# Altium PCB Hammerhead PCB R1.0.PcbDoc (part 2 of 2)
Units mil, origin at the board's own origin, x right, y up, seen from the top; angles counter-clockwise.
Board outline 4625 x 2150 mil, 4 copper layers (Top Layer, Ground Plane, Power Plane, Bottom Layer); 195 components, 202 nets, 791 pads, 418 vias.
Unrouted connection lines stored in the file: 1.
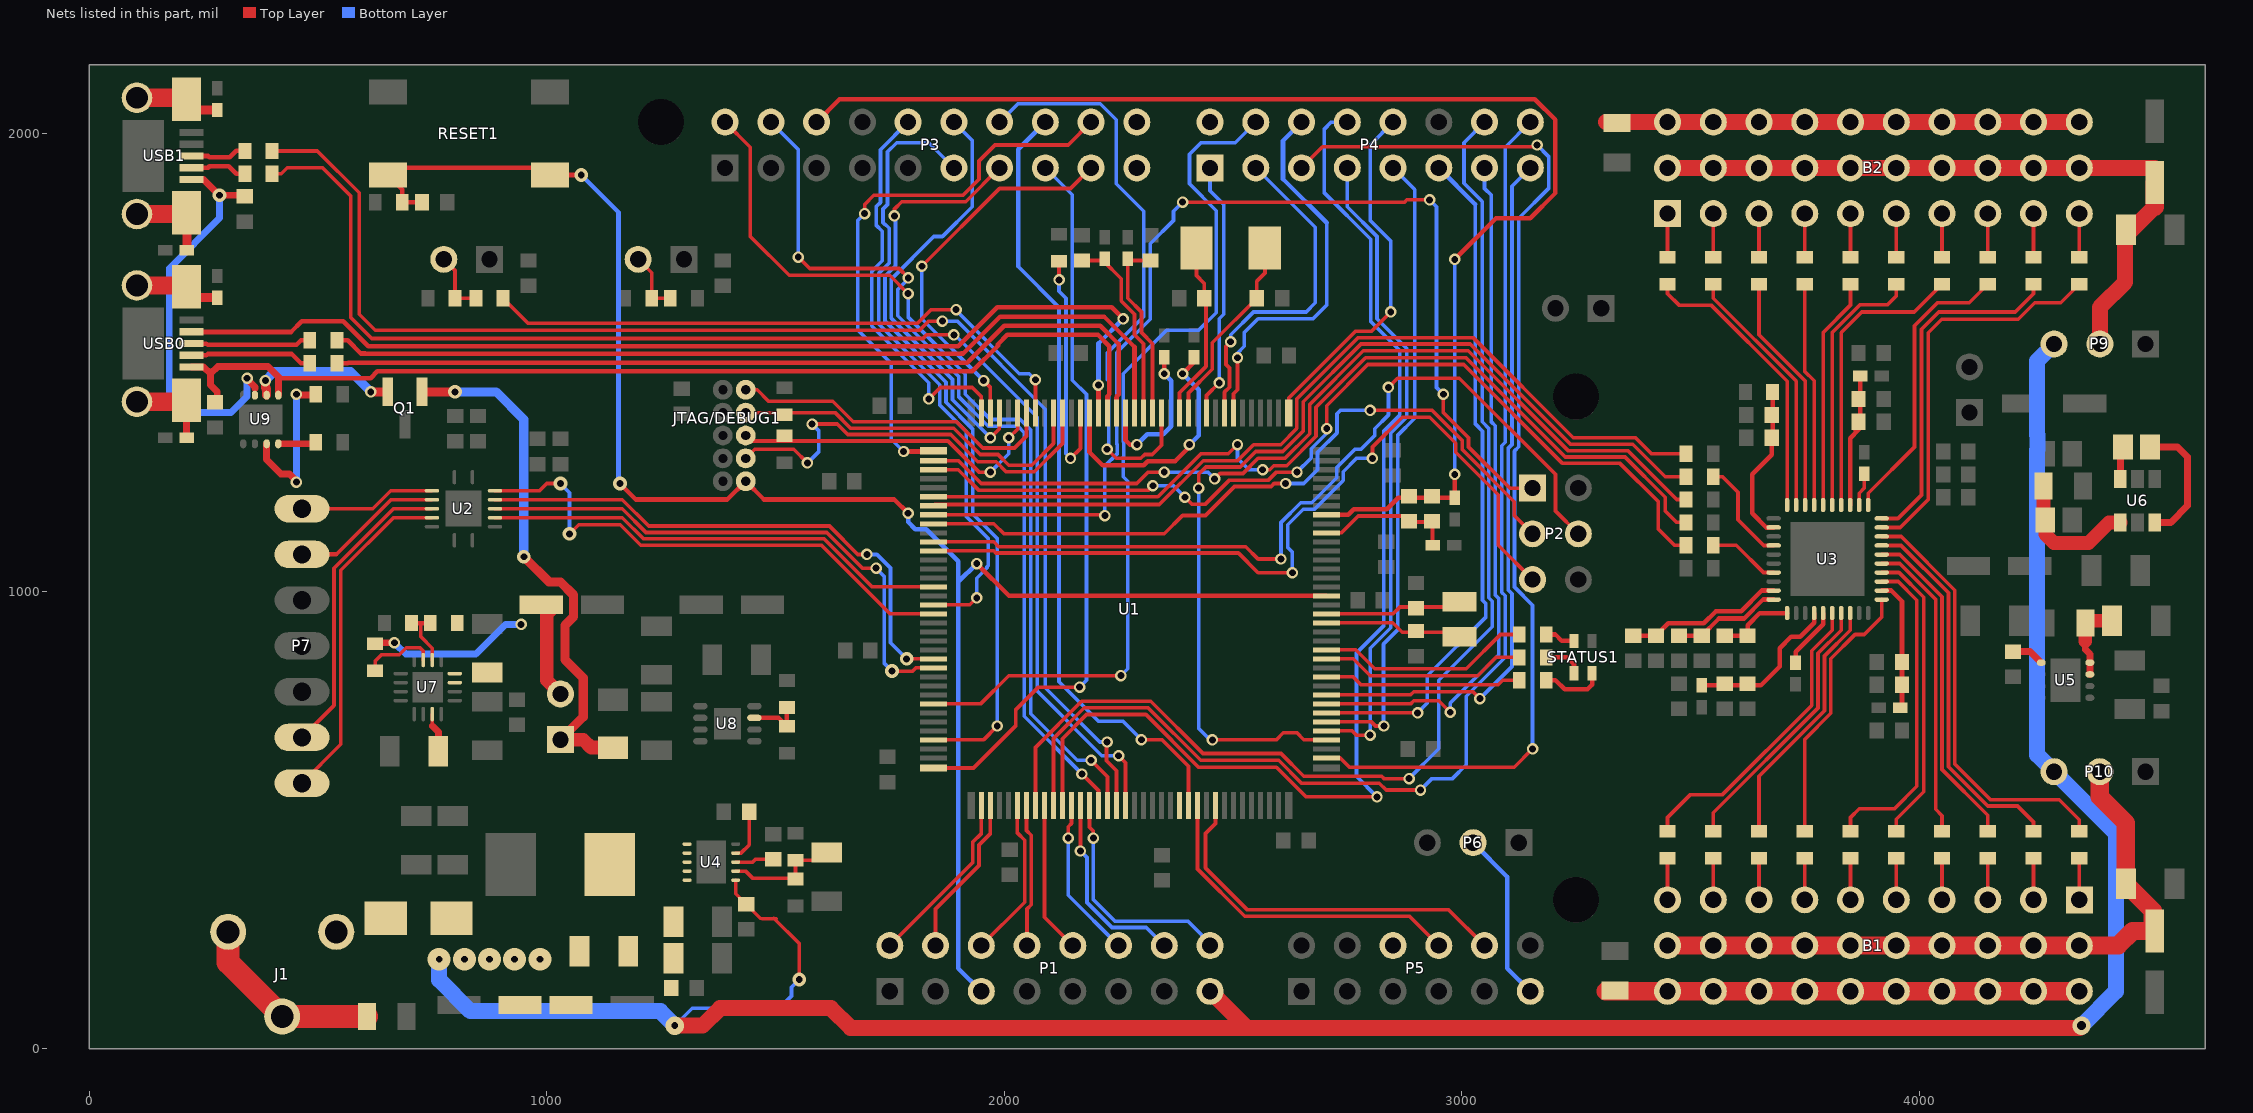
[diagram p4: the nets of this part, all layers, seen from the top]

## Via types
v1: diameter 30, hole 15, Top Layer to Bottom Layer, 230 vias
v2: diameter 25, hole 15, Top Layer to Bottom Layer, 165 vias
v3: diameter 50, hole 15, Top Layer to Bottom Layer, 14 vias
v4: diameter 40, hole 20, Top Layer to Bottom Layer, 7 vias
v5: diameter 40, hole 15, Top Layer to Bottom Layer, 1 vias
v6: diameter 50, hole 20, Top Layer to Bottom Layer, 1 vias

## Nets (pads, with @x,y where several pads share a name; then routed paths per layer and width w, separated by ;. In a path a pad name is that pad's centre, name@x,y a point inside that pad or via, vN(x,y) a via of type N, cw(c..) or ccw(c..) an arc to the next point about the centre after c; other vN are vias at no path point) (continued)
GPIO1_12: P3.17 U1.34 | length 842
  Top Layer w8: v2(1820,1710) 1990,1880 2145,1880 P3.17@2190,1925 ; v2(1955,1460) 1969.88,1445.12 U1.34@1969.88,1389.13
  Bottom Layer w8: v2(1820,1710) 1820,1595 v2(1955,1460)
GPIO1_13: P3.19
GPIO2_0: P4.10 U1.1 | length 788.2
  Top Layer w8: U1.1@2621.85,1389.13 2621.85,1421.85 2768,1568 2803,1568 v2(2845,1610)
  Bottom Layer w8: v2(2845,1610) 2845,1765 2800,1810 2800,1975 P4.10@2850,2025
GPIO2_2: P4.3 U1.8 | length 745.4
  Top Layer w8: U1.8@2481.69,1389.13 2481.69,1434.87 2492.5,1445.68 2492.5,1487.5 2485,1495 2485,1535 v2(2495,1545)
  Bottom Layer w8: v2(2495,1545) 2495,1560 2545,1610 2660,1610 2680,1630 2680,1795 P4.3@2550,1925
GPIO2_5: P4.1 U1.10 | length 563.9
  Top Layer w8: U1.10@2442.32,1389.13 2442.32,1427.32 v2(2470,1455)
  Bottom Layer w8: P4.1@2450,1925 2450,1875 2480,1845 2480,1605 2470,1595 v2(2470,1455)
GPIO2_6: P3.16 U1.97 | length 1730.6
  Top Layer w8: v2(2300,675) 2345,675 2402.95,617.05 U1.97@2402.95,530.87
  Bottom Layer w8: 2030.53,1709.47 2120,1620 2120,801.77 2206.77,715 2260,715 v2(2300,675)
  Bottom Layer w10: 2030.53,1709.47 2030.53,1965.53 P3.16@2090,2025
GPIO2_7: P4.4 U1.65 | length 1909.8
  Top Layer w8: U1.65@1845.87,753.31 1948.31,753.31 2010,815 v2(2255,815)
  Bottom Layer w8: v2(2255,815) 2270,830 2270,1240 2260,1250 2260,1293.38 2261.5,1294.88 2261.5,1325.12 2260,1326.62 2260,1475 2355,1570 2425,1570 2463.5,1608.5 2463.5,1831.5 2405,1890 2405,1955 2430,1980 2505,1980 P4.4@2550,2025
GPIO2_8: P3.20
GPIO2_9: P3.18 U1.37 | length 1240.2
  Top Layer w8: v2(1695,1825) 1695,1845 1715,1865 1910,1865 1945,1900 1945,1940 1980,1975 2140,1975 P3.18@2190,2025
  Top Layer w10: v2(1780,1305) 1844.02,1305 U1.37@1845.87,1306.85
  Bottom Layer w8: v2(1695,1825) 1680,1810 1680,1570.41 1753,1497.41 1753,1332 v2@1775,1310
GPIO2_12: P3.11 U1.54 | length 1381
  Top Layer w8: U1.54@1845.87,969.84 1924.84,969.84 v2(1940,985)
  Bottom Layer w8: P3.11@1890,1925 1835,1980 1765,1980 1745,1960 1745,1845 1735,1835 1735,1805 1738.5,1801.5 1739.71,1801.5 1748.5,1792.71 1748.5,1716.88 1725.5,1693.88 1725.5,1584.3 1859,1450.8 1859,1406.6 1917,1348.6 1917,1163 1965,1115 1965,1055 1962.5,1052.5 1962.5,1050.68 1940,1028.18 v2(1940,985)
GPIO2_14: P4.6 U1.7 | length 846.9
  Top Layer w8: U1.7@2501.38,1389.13 2501.38,1431.38 2510,1440 v2(2510,1510)
  Bottom Layer w8: v2(2510,1510) 2510,1520 2525,1535 2525,1565 2555,1595 2675,1595 2705,1625 2705,1805
  Bottom Layer w10: P4.6@2650,2025 2609.47,1984.47 2609.47,1900.53 2705,1805
GPIO3_0: P1.2 U1.74 | length 388.8
  Top Layer w8: P1.2@1750,225 1931,406 1931,450.71 1950.2,469.91 U1.74@1950.2,530.87
GPIO3_1: P1.6 U1.78 | length 351.9
  Top Layer w8: P1.6@1950,225 2045,320 2045,455 2028.94,471.06 U1.78@2028.94,530.87
GPIO3_2: P1.8 U1.79 | length 313.9
  Top Layer w8: U1.79@2048.62,530.87 2048.62,476.38 2059,466 2059,314.2 2050,305.2 P1.8@2050,225
GPIO3_3: P4.14 U1.80 | length 2610.4
  Top Layer w8: U1.80@2068.31,530.87 2068.31,658.11 2169.2,759 2320.4,759 2434.4,645 2605,645 2655,595 2825.2,595 2830.2,590 v2(2885,590)
  Bottom Layer w8: v2(2885,590) 2950,655 2950,805 3067,922 3067,977.9 3059.47,985.43 3059.47,1355.33 3045,1369.8 3045,1851.21 3005,1891.21 3005,1980 P4.14@3050,2025
GPIO3_4: P4.16 U1.82 | length 2648.6
  Top Layer w8: U1.82@2107.68,530.87 2107.68,677.68 2175,745 2314.6,745 2429.6,630 2600,630 2650,580 2820,580 2835,565 v2@2915,565
  Bottom Layer w8: v2(2910,565) 2935,590 2980,590 3010,620 3010,770.2 3095,855.2 3095,989.5 3087.47,997.03 3087.47,1317.47 3095,1325 3095,1970 P4.16@3150,2025
GPIO3_5: P4.8 U1.83 | length 2573
  Top Layer w8: U1.83@2127.36,530.87 2127.36,677.36 2180,730 2309.8,730 2424.8,615 2595,615 2660,550 v2(2815,550)
  Bottom Layer w8: P4.8@2750,2025 2715,2025 2700,2010 2700,1870 2801,1769 2801,1589.2 2865,1525.2 2865,1385 2830,1350 2830,924.6 2770,864.6 2770,595 v2(2815,550)
GPIO3_6: P5.10 U1.100 | length 825.5
  Top Layer w8: U1.100@2462.01,530.87 2462.01,492.01 2440,470 2440,394.8 2531.8,303 2972,303 P5.10@3050,225
GPIO3_8: P4.5 U1.110 | length 2389.1
  Top Layer w8: P4.5@2650,1925 2696,1971 3161,1971 v2(3165,1975) ; U1.110@2704.13,635.2 2734.79,635.2 2754.99,615 3115,615 v2(3155,655)
  Bottom Layer w8: v2(3155,655) 3155,969.1 3115.47,1008.63 3115.47,1305.87 3125,1315.4 3125,1815 3190,1880 3190,1950 v2(3165,1975)
GPIO3_9: P4.7 U1.113 | length 1426.7
  Top Layer w8: U1.113@2704.13,694.25 2760.75,694.25 2770,685 v2(2800,685)
  Bottom Layer w8: P4.7@2750,1925 2750,1840.2 2815,1775.2 2815,1595 2880,1530 2880,1380 2845,1345 2845,919.8 2800,874.8 v2(2800,685)
GPIO3_10: P4.11 U1.115 | length 1495.4
  Top Layer w8: U1.115@2704.13,733.62 v2(2903.62,733.62)
  Bottom Layer w8: v2(2903.62,733.62) 2925,755 2925,815 3053,943 3053,972.11 3045.47,979.63 3045.47,1349.53 3030,1365 3030,1845
  Bottom Layer w10: P4.11@2950,1925 3030,1845
GPIO3_11: P4.15 U1.117 | length 1557.6
  Top Layer w8: U1.117@2704.13,772.99 2887.99,772.99 2895,780 3025,780 v2(3040,765)
  Bottom Layer w8: v2(3040,765) 3110,835 3110,994.3 3101.47,1002.83 3101.47,1311.67 3110,1320.2 3110,1885 P4.15@3150,1925
GPIO3_14: P4.2
GPIO4_11: P3.15 U1.72 | length 1591.4
  Top Layer w8: U1.72@1845.87,613.15 1933.15,613.15 2025,705 2025,740 2075,790 v2(2165,790)
  Bottom Layer w8: P3.15@2090,1925 2149,1866 2149,1461 2180,1430 2180,805 v2(2165,790)
GPIO5_6: P5.6
GPIO5_7: P5.8 U1.98 | length 735.2
  Top Layer w8: U1.98@2422.64,530.87 2422.64,392.36 2526,289 2886,289 P5.8@2950,225
GPIO5_8: P4.9 U1.114 | length 1398
  Top Layer w8: U1.114@2704.13,713.94 2802.88,713.94 2811.82,705 v2(2830,705)
  Bottom Layer w8: v2(2830,705) 2829,706 2829,884 2860,915 2860,1340 2897.5,1377.5 2897.5,1877.5 P4.9@2850,1925
GPIO5_9: P4.13 U1.116 | length 1530.7
  Top Layer w8: U1.116@2704.13,753.31 2888.31,753.31 2895,760 2950,760 v2(2975,735)
  Bottom Layer w8: v2(2975,735) 2975,755 3081,861 3081,983.7 3073.47,991.23 3073.47,1361.13 3065,1369.6 3065,1865 3050,1880 P4.13@3050,1925
GPIO5_12: P3.14 U1.15 | length 1276.4
  Top Layer w8: v2(2225,1310) 2245,1290 2298.79,1290 2307.29,1298.5 2323.5,1298.5 2343.9,1318.9 U1.15@2343.9,1389.13
  Bottom Layer w8: P3.14@1990,2025 2030,2065 2210,2065 2245,2030 2245,1890 2305,1830 2305,1600 2225,1520 2225,1462.92 2228.6,1459.32 2228.6,1313.6 v2(2225,1310)
GPIO5_13: P3.12 U1.33 | length 942.6
  Top Layer w8: v2(1970,1335) 1989.57,1354.57 U1.33@1989.57,1389.13
  Bottom Layer w8: P3.12@1890,2025 1930,1985 1930,1840 1865,1775 1846.22,1775 1753.5,1682.28 1753.5,1595.9 1887,1462.4 1887,1418.2 1945,1360.2 1945,1360 v2(1970,1335)
GPIO5_14: P3.10 U1.35 | length 870.3
  Top Layer w8: v2(1835,1420) 1860,1445 1930,1445 1950.2,1424.8 U1.35@1950.2,1389.13
  Bottom Layer w8: P3.10@1790,2025 1729.53,1964.53 1729.53,1849.53 1720,1840 1720,1800 1733.5,1786.5 1733.5,1721.68 1710.5,1698.68 1710.5,1579.51 1835,1455.01 v2(1835,1420)
GPIO5_15: P1.14 U1.85 | length 425.7
  Top Layer w8: v2(2166.73,431.73) U1.85@2166.73,530.87
  Bottom Layer w8: v2(2166.73,431.73) 2181,417.46 2181,319 2235.47,264.53 2310.47,264.53 P1.14@2350,225
GPIO5_16: P1.16 U1.86 | length 508.8
  Top Layer w8: U1.86@2186.42,530.87 2186.42,483.58 2195,475 v2(2195,460)
  Bottom Layer w8: v2(2195,460) 2195,325 2241.47,278.53 2401.47,278.53 2450,230 P1.16@2450,225
GPIO5_18: P3.13 U1.69 | length 1661.3
  Top Layer w8: v2(1760,1820) 1760,1835 1776,1851 1916,1851 P3.13@1990,1925 ; U1.69@1845.87,674.57 1954.57,674.57 v2(1985,705)
  Bottom Layer w8: v2(1760,1820) 1762.5,1817.5 1762.5,1711.08 1739.5,1688.08 1739.5,1590.1 1873,1456.6 1873,1412.4 1931,1354.4 1931,1169 1985,1115 v2(1985,705)
I2C1_SCL: P3.2 U1.88 | length 2024.9
  Top Layer w8: P3.2@1390,2025 1445,1970 1445,1775 1530,1690 1750,1690 v2(1790,1650) ; v2(2190,630) 2225.79,594.21 U1.88@2225.79,530.87
  Bottom Layer w8: v2(1790,1650) 1790,1599 1915,1474 1915,1430 1970,1375 2035,1375 2058,1352 2058,732 2160,630 v2(2190,630)
I2C1_SDA: P3.4 U1.87 | length 1962.2
  Top Layer w8: v2(1550,1730) 1575,1705 1770,1705 v2(1790.43,1684.57) ; v2(2170,600) 2206.1,563.9 U1.87@2206.1,530.87
  Bottom Layer w8: P3.4@1490,2025 1550,1965 v2(1550,1730) ; v2(1790.43,1684.57) 1790.43,1682.25 1767.5,1659.32 1767.5,1601.7 1901,1468.2 1901,1424 1965,1360 2030.2,1360 2044,1346.2 2044,726 v2(2170,600)
INT: R25.1 U1.39 | length 2056
  Top Layer w8: U1.39@1845.87,1265.12 1899.88,1265.12 1945,1220 2315,1220 v2(2325,1230) ; v2(2395,1205) 2410,1190 2440,1190 2492.5,1242.5 2577.7,1242.5 2595.2,1260 v2(2640,1260) ; v2(2705,1355) 2705,1405 2795,1495 3004.6,1495 3220.6,1279 3346,1279 3430,1195 3430,1135 3465,1100 R25.1@3490.47,1100
  Bottom Layer w8: v2(2325,1230) 2370,1230 v2(2395,1205) ; v2(2640,1260) 2671,1291 2671,1310.8 2705,1344.8 v2(2705,1355)
INT_M: R25.2 U3.7 | length 157
  Top Layer w8: R25.2@3549.53,1100 3600,1100 3659.53,1040.47 U3.7@3681.89,1040.47
ISP_PGM: U1.96
MAX_CS: R24.1 U1.38 | length 1969.8
  Top Layer w8: U1.38@1845.87,1284.8 1900.2,1284.8 1950,1235 2290,1235 2315,1260 v2(2350,1260) ; v2(2460,1245) 2472,1257 2522,1257 2555,1290 2613.86,1290 2667.72,1343.87 2667.72,1407.72 2785,1525 3014.2,1525 3232.2,1307 3363,1307 3470,1200 R24.1@3490.47,1200
  Bottom Layer w8: v2(2350,1260) 2445,1260 v2(2460,1245)
MISO: R27.1 U1.42 | length 2037.7
  Top Layer w8: U1.42@1845.87,1206.06 1845.93,1206 2336,1206 2430,1300 2490,1300 v2(2510,1320) ; v2(2565,1265) 2580.4,1265 2589.4,1274 2617.66,1274 2681.72,1338.07 2681.72,1401.72 2790,1510 3009.4,1510 3226.4,1293 3357,1293 3445,1205 3445,1175 3470,1150 R27.1@3490.47,1150
  Bottom Layer w8: v2(2510,1320) 2510,1290 2535,1265 v2(2565,1265)
MOSI: R30.1 U1.43 | length 1939.7
  Top Layer w8: U1.43@1845.87,1186.38 1848.49,1189 2339,1189 2435,1285 2510.2,1285 2545.2,1320 2604.26,1320 2639.72,1355.46 2639.72,1419.72 2774,1554 3024.79,1554 3243.79,1335 3380,1335 3415,1300 R30.1@3490.47,1300
NetB1_1: B1.1 R28.2 | length 90.5
  Top Layer w8: B1.1@4350,325 R28.2@4350,415.47
NetB1_2: B1.2 R32.2 | length 90.5
  Top Layer w8: B1.2@4250,325 R32.2@4250,415.47
NetB1_3: B1.3 R36.2 | length 90.5
  Top Layer w8: B1.3@4150,325 R36.2@4150,415.47
NetB1_4: B1.4 R40.2 | length 90.5
  Top Layer w8: B1.4@4050,325 R40.2@4050,415.47
NetB1_5: B1.5 R44.2 | length 90.5
  Top Layer w8: B1.5@3950,325 R44.2@3950,415.47
NetB1_6: B1.6 R48.2 | length 90.5
  Top Layer w8: B1.6@3850,325 R48.2@3850,415.47
NetB1_7: B1.7 R52.2 | length 90.5
  Top Layer w8: B1.7@3750,325 R52.2@3750,415.47
NetB1_8: B1.8 R56.2 | length 90.5
  Top Layer w8: B1.8@3650,325 R56.2@3650,415.47
NetB1_9: B1.9 R60.2 | length 90.5
  Top Layer w8: B1.9@3550,325 R60.2@3550,415.47
NetB1_10: B1.10 R64.2 | length 90.5
  Top Layer w8: B1.10@3450,325 R64.2@3450,415.47
NetB1_11: B1.11 B1.12 B1.13 B1.14 B1.15 B1.16 B1.17 B1.18 B1.19 B1.20 C71.1 C73.2 P10.2 | length 1476
  Top Layer w40: B1.20@3450,225 4435,225 4466.93,256.93 C71.1@4515,256.93 4510.5,261.43 4510.5,301.35 C73.2@4451.85,360 4451.85,493.15 4395,550 P10.2@4395,605
NetB1_21: B1.21 B1.22 B1.23 B1.24 B1.25 B1.26 B1.27 B1.28 B1.29 B1.30 FB12.2 | length 1035
  Top Layer w40: FB12.2@3315,125 B1.21@4350,125
NetB2_1: B2.1 R65.1 | length 95.5
  Top Layer w8: R65.1@3450,1729.53 B2.1@3450,1825
NetB2_2: B2.2 R61.1 | length 95.5
  Top Layer w8: R61.1@3550,1729.53 B2.2@3550,1825
NetB2_3: B2.3 R57.1 | length 95.5
  Top Layer w8: R57.1@3650,1729.53 B2.3@3650,1825
NetB2_4: B2.4 R53.1 | length 95.5
  Top Layer w8: R53.1@3750,1729.53 B2.4@3750,1825
NetB2_5: B2.5 R49.1 | length 95.5
  Top Layer w8: R49.1@3850,1729.53 B2.5@3850,1825
NetB2_6: B2.6 R45.1 | length 95.5
  Top Layer w8: R45.1@3950,1729.53 B2.6@3950,1825
NetB2_7: B2.7 R41.1 | length 95.5
  Top Layer w8: R41.1@4050,1729.53 B2.7@4050,1825
NetB2_8: B2.8 R37.1 | length 95.5
  Top Layer w8: R37.1@4150,1729.53 B2.8@4150,1825
NetB2_9: B2.9 R33.1 | length 95.5
  Top Layer w8: R33.1@4250,1729.53 B2.9@4250,1825
NetB2_10: B2.10 R29.1 | length 95.5
  Top Layer w8: R29.1@4350,1729.53 B2.10@4350,1825
NetB2_11: B2.11 B2.12 B2.13 B2.14 B2.15 B2.16 B2.17 B2.18 B2.19 B2.20 C72.1 C74.2 P9.2 | length 1467.8
  Top Layer w35: B2.11@3450,1925 B2.12@3550,1925 B2.13@3650,1925 B2.14@3750,1925 B2.15@3850,1925 B2.16@3950,1925 B2.17@4050,1925 B2.18@4150,1925 B2.19@4250,1925 B2.20@4350,1925 C72.1@4515,1925 ; P9.2@4395,1540 4395,1620 4450,1675 4450,1755 4450,1775 4515,1840
  Top Layer w40: 4515,1840 C72.1@4515,1893.07
NetB2_21: B2.21 B2.22 B2.23 B2.24 B2.25 B2.26 B2.27 B2.28 B2.29 B2.30 FB13.1 | length 1035
  Top Layer w35: FB13.1@3315,2025 B2.30@4350,2025
NetC5_2: C5.2 FB1.2 U1.17 | length 416
  Top Layer w8: C5.2@2170,1722.44 2216.06,1722.44 2256,1682.5 2256,1634.2 2285,1605.2 2285,1560 2304.53,1540.47 U1.17@2304.53,1389.13
NetC6_2: C6.2 FB2.2 U1.16 | length 411.3
  Top Layer w8: C6.2@2320,1722.44 2273.94,1722.44 FB2.2@2270,1726.38 2270,1640 2300,1610 2300,1565 2324.21,1540.79 U1.16@2324.21,1389.13
NetC34_2: C34.2 C35.2 U3.9 | length 347.7
  Top Layer w10: C35.2@3375,902.56 C34.2@3425,902.56 3451.75,929.31 3529.12,929.31 3555.81,956 3610.75,956 3655.85,1001.1 U3.9@3681.89,1001.1
NetC36_2: C36.2 C37.2 U3.10 | length 239.6
  Top Layer w10: C36.2@3475,902.56 C37.2@3525,902.56 3562.44,940 3617.37,940 3658.79,981.42 U3.10@3681.89,981.42
NetC38_2: C38.2 C39.2 U3.11 | length 170
  Top Layer w10: C39.2@3575,902.56 C38.2@3625,902.56 3625,925 3651.89,951.89 U3.11@3711.42,951.89
NetC40_2: C40.2 C41.2 FB7.1 U3.14 | length 347
  Top Layer w10: FB7.1@3525,793.62 3653.62,793.62 3695,835 3695,875 3720,900 3740,900 3770.47,930.47 U3.14@3770.47,951.89
NetC42_2: C42.2 C43.2 FB8.1 U3.22 | length 288.3
  Top Layer w10: U3.22@3918.11,1001.1 3938.9,1001.1 3962.56,977.44 C42.2@3962.56,845 C43.2@3962.56,795 3962.56,748.94 FB8.1@3958.62,745
NetC44_2: C44.2 C45.2 R20.2 U3.2 | length 340.4
  Top Layer w10: C44.2@3677.56,1335 3677.56,1297.56 3635,1255 3635,1170 3666.1,1138.9 U3.2@3681.89,1138.9 ; C44.2@3679.53,1336.97 R20.2@3679.53,1435
NetC46_2: C46.2 C47.2 FB9.1 U3.33 | length 301.6
  Top Layer w10: U3.33@3849.21,1188.11 3849.21,1334.21 3867.44,1352.44 C46.2@3867.44,1360 ; C46.2@3860,1352.56 C46.2@3867.44,1360 ; FB9.1@3871.38,1470 3871.38,1373.94 C46.2@3867.44,1370 C46.2@3867.44,1360
NetC51_2: C51.2 U7.11 | length 86.5
  Top Layer w8: 749.84,705.16 U7.11@749.84,730.94
  Top Layer w15: 749.84,705.16 763.15,691.85 C51.2@763.15,650
NetC52_2: C52.2 U5.5 | length 71.9
  Top Layer w15: C52.2@4205,867.56 4242.68,867.56 U5.5@4266.85,843.39
NetC55_2: C55.2 FB16.1 U6.1 | length 298.3
  Top Layer w30: FB16.1@4271.69,1230 4271.69,1158.78 C55.2@4275.47,1155 4275.47,1124.53 4295,1105 4370,1105 4415,1150 U6.1@4440,1150
NetC57_1: C57.1 U6.6 | length 72.8
  Top Layer w15: U6.6@4440,1244.49 C57.1@4440,1309.53
  Top Layer w25: C57.1@4440,1309.53 C57.1@4445.47,1315
NetC57_2: C57.2 U6.3 | length 284.7
  Top Layer w15: C57.2@4504.53,1315 4565,1315 4586.5,1293.5 4586.5,1186.5 4550,1150 U6.3@4514.8,1150
NetC87_2: C87.2 FB15.1 U5.3 U5.4 | length 176.8
  Top Layer w15: 4363.15,890 4363.15,871.85 4373.15,861.85 U5.4@4373.15,843.39 U5.3@4373.15,817.8 ; FB15.1@4363.31,930 FB15.1@4368.31,935
  Top Layer w30: 4363.15,890 FB15.1@4363.15,929.84 ; FB15.1@4368.31,935 C87.2@4421.85,935
NetC96_1: C96.1 C99.2 P8.2 R31.1 R34.2 U7.15 U7.16 | length 597.9
  Top Layer w15: R31.1@627.47,887 v2(667,887) ; C96.1@988.07,970 C96.1@1020,970
  Top Layer w30: C96.1@1020,970 1000,950 1000,805 P8.2@1030,775
  Bottom Layer w15: v2@669.5,884.5 692,862 845,862 910,927 v2(944,927)
NetD3_1: D3.1 P8.1 Q1.1 | length 1174.4
  Top Layer w20: Q1.1@727.4,1435.43 v1(799.57,1435.43) ; v1(950,1075) 1005,1020 1030,1020 1058.68,991.32 1058.68,943.68 1040,925 1040,850 1080,810 1080,725 P8.1@1030,675
  Top Layer w30: P8.1@1030,675 1080,675 1097.17,657.83 D3.1@1145,657.83
  Bottom Layer w20: v1(799.57,1435.43) 889.57,1435.43 950,1375 v1(950,1075)
NetD5_2: D5.2 J1.1
NetDBGEN1_2: DBGEN1.2 R16.2 R17.2 | length 138.2
  Top Layer w8: DBGEN1.2@1200,1725 1229.53,1695.47 R17.2@1229.53,1640 R16.2@1270.47,1640
NetFB3_1: FB3.1 U1.23 | length 569.1
  Top Layer w10: U1.23@2186.42,1389.13 2186.42,1303.58 2215,1275 2305,1275 2313.5,1283.5 2373.5,1283.5 2401.5,1311.5 2401.5,1323.5 v2(2405,1320) ; v2(2390,1475) 2415,1500 FB3.1@2415,1511.38
  Bottom Layer w10: v2(2390,1475) 2425,1440 2425,1340 v2(2405,1320)
NetFB4_1: FB4.1 U1.19 | length 337.4
  Top Layer w10: U1.19@2265.16,1389.13 2265.16,1329.84 2275,1320 v2(2290,1320) ; v2(2350,1475) FB4.1@2350,1511.38
  Bottom Layer w10: v2(2290,1320) 2312.5,1342.5 2347.5,1342.5 2365,1360 2365,1460 v2(2350,1475)
NetFB10_2: FB10.2 U3.15 | length 121.8
  Top Layer w10: FB10.2@3730,855 3730,867.37 3790.16,927.53 U3.15@3790.16,951.89
NetFB11_2: FB11.2 U3.32 | length 72.9
  Top Layer w8: U3.32@3868.9,1188.11 3868.9,1213.9 3880,1225 FB11.2@3880,1256.38
NetFB14_2: FB14.2 J1.2 J1.3 | length 418.8
  Top Layer w30: FB14.2@606.69,70 FB14.2@606.69,70
  Top Layer w50: J1.2@303.78,255 303.78,188.07 J1.3@421.89,69.96 FB14.2@606.69,70
NetFB17_2: FB17.2 USB0.8 USB0.9 | length 153.2
  Top Layer w20: USB0.9@236.26,1641.38 FB17.2@280,1641.38
  Top Layer w40: USB0.8@104.37,1667.95 209.69,1667.95 USB0.9@212.64,1665
NetFB18_2: FB18.2 USB1.8 USB1.9 | length 175.6
  Top Layer w20: USB1.9@209.69,2051.38 FB18.2@280,2051.38
  Top Layer w40: USB1.8@104.37,2077.95 USB1.9@209.69,2077.95
NetFB19_2: FB19.2 USB0.6 USB0.7 | length 190.5
  Top Layer w15: FB19.2@212.64,1335.98 USB0.6@212.64,1416.97
  Top Layer w40: USB0.7@104.37,1414.02 209.69,1414.02 USB0.6@212.64,1416.97
NetFB21_2: FB21.2 USB1.6 USB1.7 | length 186.3
  Top Layer w20: FB21.2@213.62,1745 USB1.6@213.62,1825.98
  Top Layer w40: USB1.7@104.37,1824.02 USB1.6@209.69,1824.02
NetP5_11: P5.11 P6.2 | length 376.8
  Bottom Layer w10: P6.2@3025,450 3100,375 3100,175 P5.11@3150,125
NetP7_1: P7.1 U2.13 | length 300.4
  Top Layer w8: P7.1@465,1180 620,1180 659.37,1219.37 U2.13@749.1,1219.37
NetP7_2: P7.2 U2.12 | length 333.7
  Top Layer w8: 540,1080 659.68,1199.68 U2.12@749.1,1199.68
  Top Layer w10: P7.2@465,1080 540,1080
NetP7_6: P7.6 U2.11 | length 666.9
  Top Layer w8: P7.6@465,680 535,750 535,1050 665,1180 U2.11@749.1,1180
NetP7_7: P7.7 U2.10 | length 747.2
  Top Layer w8: P7.7@465,580 550,665 550,1045.2 665.11,1160.31 U2.10@749.1,1160.31
NetQ1_2: Q1.2 U9.6 | length 327.4
  Top Layer w20: v2(385,1460) 385.7,1459.3 385.7,1444.3 387.8,1442.2 U9.6@387.8,1428.15 ; v2(615.43,1435.43) Q1.2@652.6,1435.43
  Bottom Layer w20: v2(385,1460) 405,1480 570.87,1480 v2(615.43,1435.43)
NetR9_2: R9.2 U1.24 | length 549
  Top Layer w8: v2(2120,1680) R9.2@2120,1720.47 ; v2(2145,1290) 2166.73,1311.73 U1.24@2166.73,1389.13
  Bottom Layer w8: v2(2120,1680) 2120,1655 2135,1640 2135,1300 v2(2145,1290)
NetR10_2: R10.2 STATUS1.3 | length 86.9
  Top Layer w10: R10.2@3184.53,855 3230,855 3245.63,839.37 STATUS1.3@3245.63,820
NetR11_1: R11.1 STATUS1.4 | length 67
  Top Layer w10: R11.1@3184.53,905 3205,905 3219.13,890.87 STATUS1.4@3245.63,890.87
NetR13_2: R13.2 STATUS1.2 | length 137.9
  Top Layer w10: R13.2@3184.53,805 3205,805 3225,785 3275,785 3285,795 STATUS1.2@3285,820
NetR14_2: R14.2 R15.2 TRST1.2 | length 141.1
  Top Layer w8: TRST1.2@775,1725 799.53,1700.47 R15.2@799.53,1640 R14.2@845.47,1640
NetR21_1: R21.1 R22.2 U8.3 | length 119.5
  Top Layer w10: U8.3@1454.06,722.8 1506.73,722.8 R21.1@1525,704.53 R22.2@1525,745.47
NetR28_1: R28.1 U3.28 | length 936.4
  Top Layer w8: U3.28@3918.11,1119.21 3960.59,1119.21 4078,1001.8 4078,621.8 4155.8,544 4306,544 4350,500 R28.1@4350,474.53
NetR29_2: R29.2 U3.29 | length 865.7
  Top Layer w8: U3.29@3918.11,1138.9 3958.9,1138.9 4020,1200 4020,1564.75 4049.25,1594 4216.63,1594 4252.63,1630 4309.53,1630 R29.2@4350,1670.47
NetR31_2: R31.2 U7.3 | length 161.4
  Top Layer w8: R31.2@625,825.47 625,847 638.75,860.75 677.75,860.75 693,876 723,876 730.16,868.84 U7.3@730.16,849.06
NetR32_1: R32.1 U3.27 | length 808.5
  Top Layer w8: 3935,1099.53 3960.47,1099.53 4064,996 4064,616 4150,530 4215,530 4250,495 R32.1@4250,474.53
NetR33_2: R33.2 U3.30 | length 768.2
  Top Layer w8: U3.30@3918.11,1158.58 3953.58,1158.58 4005,1210 4005,1572.37 4042.63,1610 4210,1610 4250,1650 R33.2@4250,1670.47
NetR34_1: R34.1 R35.2 U7.2 | length 132.2
  Top Layer w8: 725,930 725,900 749.84,875.16 U7.2@749.84,849.06
  Top Layer w10: R35.2@704.53,930 R34.1@745.47,930
NetR36_1: R36.1 U3.26 | length 724.4
  Top Layer w8: U3.26@3918.11,1079.84 3957.46,1079.84 4050,987.3 4050,610 4150,510 R36.1@4150,474.53
NetR37_2: R37.2 U3.31 | length 631.4
  Top Layer w8: U3.31@3888.58,1188.11 3888.58,1213.58 3990,1315 3990,1580 4040,1630 4109.53,1630 R37.2@4150,1670.47
NetR40_1: R40.1 U3.25 | length 663.2
  Top Layer w8: U3.25@3918.11,1060.16 3957.34,1060.16 4036,981.5 4036,523 4050,509 R40.1@4050,474.53
NetR41_2: R41.2 U3.34 | length 641
  Top Layer w8: U3.34@3829.53,1188.11 3829.53,1564.93 3874.6,1610 3989.53,1610 R41.2@4050,1670.47
NetR44_1: R44.1 U3.24 | length 650.9
  Top Layer w8: U3.24@3918.11,1040.47 3955.74,1040.47 4010,986.21 4010,561 3950,501 R44.1@3950,474.53
NetR45_2: R45.2 U3.35 | length 575.7
  Top Layer w8: U3.35@3809.84,1188.11 3809.84,1565.04 3870.8,1626 3931,1626 3950,1645 R45.2@3950,1670.47
NetR48_1: R48.1 U3.23 | length 704.4
  Top Layer w8: R48.1@3850,474.53 3850,505 3869,524 3946,524 3995,573 3995,980 3954.21,1020.79 U3.23@3918.11,1020.79
NetR49_2: R49.2 U3.36 | length 507.1
  Top Layer w8: U3.36@3790.16,1188.11 3790.16,1565.16 3850,1625 R49.2@3850,1670.47
NetR52_1: R52.1 U3.21 | length 588.2
  Top Layer w8: R52.1@3750,474.53 3750,675.6 3807,732.6 3807,852 3860,905 3880,905 3918.11,943.11 U3.21@3918.11,981.42
NetR53_2: R53.2 U3.37 | length 490.8
  Top Layer w8: R53.2@3750,1670.47 3750,1480 3770.47,1459.53 U3.37@3770.47,1188.11
NetR56_1: R56.1 U3.18 | length 559.9
  Top Layer w8: R56.1@3650,474.53 3650,595.4 3793,738.4 3793,858 3849.21,914.21 U3.18@3849.21,951.89
NetR57_2: R57.2 U3.38 | length 524.1
  Top Layer w8: R57.2@3650,1670.47 3650,1560 3750.79,1459.21 U3.38@3750.79,1188.11
NetR60_1: R60.1 U3.17 | length 593.1
  Top Layer w8: R60.1@3550,474.53 3550,515.2 3779,744.2 3779,863.8 3829.53,914.33 U3.17@3829.53,951.89
NetR61_2: R61.2 U3.39 | length 557.4
  Top Layer w8: R61.2@3550,1670.47 3550,1640 3731.1,1458.9 U3.39@3731.1,1188.11
NetR64_1: R64.1 U3.16 | length 667.4
  Top Layer w8: R64.1@3450,474.53 3450,505 3500,555 3570,555 3765,750 3765,869.6 3809.84,914.44 U3.16@3809.84,951.89
NetR65_2: R65.2 U3.40 | length 631.8
  Top Layer w8: R65.2@3450,1670.47 3450,1650 3475,1625 3545.2,1625 3711.42,1458.78 U3.40@3711.42,1188.11
NetR75_2: R75.2 U9.4 | length 83.5
  Top Layer w15: U9.4@413.39,1321.85 R75.2@496.85,1321.85
RESET: C13.2 JTAG/DEBUG1.10 P1.5 R12.1 RESET1.1 U1.128 | length 3925.9
  Top Layer w10: C13.2@727.44,1850 R12.1@684.53,1850 684.53,1877.76 RESET1.1@652.83,1909.45 668.39,1925 991.61,1925 RESET1.1@1007.17,1909.45 v1(1075.55,1909.45) ; v1(1160,1235) 1195,1200 1395,1200 JTAG/DEBUG1.10@1435,1240 1475,1200 1760,1200 v2(1790,1170) ; v2(1940,1060) 2010.47,989.53 U1.128@2704.13,989.53
  Bottom Layer w10: v1(1075.55,1909.45) 1156.97,1828.03 v1@1156.97,1238.03 ; v2(1790,1170) 1790,1150.81 1805.81,1135 1830,1135 1900,1065 1900,1020 ; v2(1940,1060) 1900,1020 ; P1.5@1950,125 1900,175 1900,1020
  Bottom Layer w15: v1@1156.97,1238.03 v1(1160,1235)
RTCX1: C19.2 U1.125 X2.1 | length 303.5
  Top Layer w8: U1.125@2704.13,930.47 2849.53,930.47 2870,910 2985,910 X2.1@2995,900
RTCX2: C20.2 U1.126 X2.2 | length 301.9
  Top Layer w8: U1.126@2704.13,950.16 2850.16,950.16 2865,965 2983.23,965 X2.2@2995,976.77
SCK: R23.2 U3.4 | length 230.1
  Top Layer w8: R23.2@3549.53,1250 3570,1250 3604,1216 3604,1155.6 3660.07,1099.53 U3.4@3681.89,1099.53
SCLK: R23.1 U1.112 | length 2201.2
  Top Layer w8: v2(2425,1225) 2425,1255 2441,1271 2516,1271 2550,1305 2609.06,1305 2653.72,1349.67 2653.72,1413.72 2780,1540 3018.99,1540 3237.99,1321 3374,1321 3445,1250 R23.1@3490.47,1250 ; v2(2455,674.57) 2594.57,674.57 2610,690 2640,690 2655,675 U1.112@2705,675
  Bottom Layer w8: v2(2425,1225) 2425,700 v2@2455,670
SGPIO6: P1.12 U1.84 | length 354.3
  Top Layer w8: v2(2140,460) 2140,485 2147.05,492.05 U1.84@2147.05,530.87
  Bottom Layer w8: v2(2140,460) 2140,335 P1.12@2250,225
SS: C86.2 U4.4 | length 109.3
  Top Layer w8: U4.4@1413.15,427.19 1424.69,427.19 1442.56,445.06 C86.2@1442.56,517.5
SSP1_MISO: P2.1 U1.44 | length 2425.4
  Top Layer w8: U1.44@1845.87,1166.69 v2@2220,1166.69 ; v2(2390,1850) 2875,1850 2880,1855 v2(2930,1855) ; v2(2960,1430) 2960,1390 3015,1335 3015,1315 3105,1225 P2.1@3155,1225
  Bottom Layer w8: v2(2220,1165) 2220,1273.18 2247.5,1300.68 2247.5,1319.32 2246,1320.82 2246,1521.2 2319,1594.2 2319,1759 2370,1810 2370,1830 v2(2390,1850) ; v2(2930,1855) 2945,1840 2945,1445 v2(2960,1430)
SSP1_MOSI: P2.4 U1.47 | length 1880.1
  Top Layer w8: U1.47@1845.87,1107.64 1977.17,1107.64 1987.81,1097 2528,1097 2555,1070 v2(2605,1070) ; v2(2840,1445) 2860,1465 2995,1465 3205,1255 3205,1175 P2.4@3255,1125
  Bottom Layer w8: v2(2605,1070) 2605,1150 2648,1193 2672.4,1193 2727,1247.6 2727,1270.18 2766.82,1310 2780,1310 2810,1340 2810,1355 2840,1385 v2(2840,1445)
SSP1_SCK: P2.3 U1.45 | length 1618.1
  Top Layer w8: U1.45@1845.87,1147.01 1977.4,1147.01 1999.41,1125 2350,1125 2390,1165 2440,1165 2503.5,1228.5 2583.5,1228.5 2590,1235 v2(2615,1235) ; v2(2800,1395) 2935,1395 3001,1329 3001,1309.2 3115,1195.2 3115,1165 P2.3@3155,1125
  Bottom Layer w8: v2(2615,1235) 2655,1235 2685,1265 2685,1303.18 2727.5,1345.68 2727.5,1387.5 2735,1395 v2(2800,1395)
SSP1_SSEL: P2.5 U1.48 | length 1794.7
  Top Layer w8: U1.48@1845.87,1087.95 1977.06,1087.95 1982.01,1083 2512,1083 2555,1040 v2(2630,1040) ; v2(2805,1290) 2805,1315 2870,1380 2930.2,1380 2987,1323.2 2987,1303.4 3080,1210.4 3080,1100 P2.5@3155,1025
  Bottom Layer w8: v2(2630,1040) 2630,1085 2620,1095 2620,1145 2654,1179 2678.2,1179 2741,1241.8 2741,1261 2770,1290 v2(2805,1290)
STATUS_BLUE: R11.2 U1.122 | length 469.6
  Top Layer w8: U1.122@2704.13,871.42 2768.58,871.42 2810,830 3010,830 3085,905 R11.2@3125.47,905
STATUS_GREEN: R10.1 U1.121 | length 453.1
  Top Layer w8: U1.121@2704.13,851.73 2763.27,851.73 2800,815 3035,815 3075,855 R10.1@3125.47,855
STATUS_RED: R13.1 U1.119 | length 432.7
  Top Layer w8: U1.119@2704.13,812.36 2762.64,812.36 2780,795 3080,795 3090,805 R13.1@3125.47,805
SW: C80.2 L1.1 U4.6 U4.7
TCK/SWDCLK: JTAG/DEBUG1.4 R19.1 U1.27 | length 806.5
  Top Layer w8: JTAG/DEBUG1.4@1435,1390 1630.2,1390 1664.2,1356 1889.94,1356 1947.44,1298.5 1986.5,1298.5 2010,1275 2060,1275 2107.68,1322.68 U1.27@2107.68,1389.13
TDI: JTAG/DEBUG1.8 U1.26 | length 939.8
  Top Layer w8: JTAG/DEBUG1.8@1435,1290 1455,1310 1540,1310 v2(1570,1280) ; v2(1580,1365) 1635,1365 1658,1342 1883,1342 1942.5,1282.5 1982.5,1282.5 2004,1261 2065.8,1261 2127.36,1322.56 U1.26@2127.36,1389.13
  Bottom Layer w8: v2(1570,1280) 1595,1305 1595,1350 v2(1580,1365)
TDO/SWO: JTAG/DEBUG1.6 R18.1 U1.31 | length 722.6
  Top Layer w8: JTAG/DEBUG1.6@1435,1340 1447,1328 1877,1328 1945,1260 v2(1970,1260) ; v2(2010,1335) 2030,1355 2030,1388.07 U1.31@2028.94,1389.13
  Bottom Layer w8: v2(1970,1260) 2010,1300 v2(2010,1335)
TMS/SWDIO: JTAG/DEBUG1.2 U1.30 | length 727.8
  Top Layer w8: JTAG/DEBUG1.2@1435,1440 1460,1440 1485,1415 1625,1415 1670,1370 1895.74,1370 1953.24,1312.5 2022.5,1312.5 2048.62,1338.62 U1.30@2048.62,1389.13
TRST: R14.1 U1.29 | length 1336.1
  Top Layer w8: R14.1@904.53,1640 959.53,1585 1810,1585 1840,1615 v2(1895,1615) ; U1.29@2068.31,1389.13 v2(2068.31,1461.69)
  Bottom Layer w8: v2(1895,1615) 1895,1613.18 2033.18,1475 2055,1475 v2(2068.31,1461.69)
U0_RXD: P1.10 U1.81 | length 331.6
  Top Layer w8: U1.81@2087.99,530.87 2087.99,287.01 P1.10@2150,225
U0_TXD: P1.4 U1.75 | length 355.5
  Top Layer w8: P1.4@1850,225 1850,305 1945,400 1945,444.91 1969.88,469.8 U1.75@1969.88,530.87
UART1_CTS: U1.55 U2.2 | length 1152.7
  Top Layer w8: U2.2@886.9,1219.37 984.37,1219.37 1000,1235 v1(1030,1235) ; v1(1050,1125) 1070,1145 1160.6,1145 1205.6,1100 1600.6,1100 1750.45,950.16 U1.55@1845.87,950.16
  Bottom Layer w8: v1(1030,1235) 1050,1215 v1(1050,1125)
UART1_RTS: U1.52 U2.5 | length 1021.6
  Top Layer w8: U2.5@886.9,1160.31 1165.09,1160.31 1211.4,1114 1606.4,1114 1711.19,1009.21 U1.52@1845.87,1009.21
UART1_RX: U1.61 U2.4 | length 1220.2
  Top Layer w8: U2.4@886.9,1180 1165.2,1180 1217.2,1128 1612.2,1128 1690.2,1050 v2(1720,1050) ; v1(1755,825) 1800,825 1807.05,832.05 U1.61@1845.87,832.05
  Bottom Layer w8: v2(1720,1050) 1737.56,1032.44 1737.56,842.44 v1(1755,825)
UART1_TX: U1.60 U2.3 | length 1198.8
  Top Layer w8: U2.3@886.9,1199.68 1165.32,1199.68 1223,1142 1618,1142 1680,1080 v2(1700,1080) ; v1(1786.73,851.73) U1.60@1845.87,851.73
  Bottom Layer w8: v2(1700,1080) 1721.82,1080 1751.56,1050.26 1751.56,886.91 v1(1786.73,851.73)
USB0_ID: U1.22 USB0.4 | length 2343.1
  Top Layer w10: USB0.4@223.46,1566.57 223.87,1566.17 441.17,1566.17 465,1590 555,1590 610,1535 1900,1535 1985,1620 2235,1620 v2(2260,1595) ; U1.22@2206.1,1389.13 v2(2206.1,1450)
  Bottom Layer w10: v2(2206.1,1450) 2206.1,1541.1 v2(2260,1595)
USB0_N: R71.2 U1.20 | length 1911.7
  Top Layer w10: R71.2@541.53,1498 565,1498 566.14,1499.14 1919.14,1499.14 2000,1580 2210,1580 2250,1540 2250,1429.53 2246,1425.53 2246,1423.37 2245.47,1422.85 U1.20@2245.47,1389.13
USB0_P: R70.2 U1.18 | length 1960.8
  Top Layer w10: R70.2@541.53,1548 565,1548 593.86,1519.14 603.23,1519.14 603.37,1519 1906.63,1519 1906.77,1519.14 1910.86,1519.14 1991.72,1600 2218.28,1600 2284.84,1533.44 U1.18@2284.84,1389.13
USB0P_N: R71.1 USB0.2 | length 268.5
  Top Layer w10: USB0.2@223.46,1515.39 256,1515.39 258.8,1518.19 442.81,1518.19 463,1498 R71.1@482.47,1498
USB0P_P: R70.1 USB0.3 | length 264.2
  Top Layer w10: USB0.3@223.46,1540.98 256,1540.98 258.8,1538.19 453.19,1538.19 463,1548 R70.1@482.47,1548
USB1_N: R73.2 U1.90 | length 3016.4
  Top Layer w8: R73.2@399.53,1912 420,1912 433,1925 510,1925 572,1863 572,1597.54 617.54,1552 1822.46,1552 1830.46,1560 v2(1890,1560) ; v2(2250,640) 2265.16,624.84 U1.90@2265.16,530.87
  Bottom Layer w8: v2(1890,1560) 1892,1560 2072,1380 2072,781.33 2213.33,640 v2(2250,640)
USB1_P: R72.2 U1.89 | length 3038.1
  Top Layer w8: R72.2@399.53,1962 498.46,1962 590,1870.46 590,1605 625,1570 1815,1570 1835,1590 v2(1865,1590) ; v2(2225,670) 2223.5,668.5 2223.5,629.02 2245.47,607.05 U1.89@2245.47,530.87
  Bottom Layer w8: v2(1865,1590) 1897.48,1590 2090,1397.48 2090,788.79 2208.79,670 v2(2225,670)
USB1P_N: R73.1 USB1.2 | length 124.9
  Top Layer w10: USB1.2@223.46,1925.39 260,1925.39 262.8,1928.19 304.81,1928.19 321,1912 R73.1@340.47,1912
USB1P_P: R72.1 USB1.3 | length 123.9
  Top Layer w10: USB1.3@223.46,1950.98 260,1950.98 262.8,1948.19 307.19,1948.19 321,1962 R72.1@340.47,1962
VBST: C80.1 U4.8
VBUS0: C105.2 R74.2 U1.21 U9.3 U9.5 USB0.1 | length 2687.1
  Top Layer w10: 420,1465 615,1465 630,1480 1930,1480 1986.5,1536.5 1986.5,1539.73 2006.77,1560 2205,1560 2230,1535 2230,1430 2225.79,1425.79 U1.21@2225.79,1389.13
  Top Layer w15: USB0.1@223.46,1489.8 250.2,1489.8 265,1475 ; C105.2@280,1412.56 280,1435 265,1450 265,1475 ; U9.3@387.8,1321.85 387.8,1287.2 418.82,1256.18 437.82,1256.18 v2@454.5,1239.5 ; U9.5@413.39,1428.15 413.39,1468.38 390.77,1491 281,1491 265,1475 ; v2@453,1428.15 R74.2@496.85,1428.15
  Bottom Layer w15: v2(453,1238) v2(453,1430)
VBUS1: C106.2 U9.7 USB1.1 | length 891.7
  Top Layer w15: USB1.1@223.46,1899.8 250.2,1899.8 v1(285,1865) 337.56,1865 C106.2@340,1862.56 ; v2(345,1465) 345,1463.23 362.2,1446.03 362.2,1442.8
  Bottom Layer w15: v1(285,1865) 285,1815 175,1705 175,1415 200,1390 310,1390 345,1425 v2(345,1465)
VDDA: C17.2 C18.2 FB5.2 P3.6 U1.137 | length 2912
  Top Layer w10: P3.6@1590,2025 1640,2075 3160,2075 3205,2030 3205,1870 3150,1815 3075,1815 v2(2985,1725) ; U1.137@2704.13,1166.69 2751.69,1166.69 2764,1179 2836.63,1179 2861.25,1203.62 FB5.2@2985,1203.62 v2(2985,1255)
  Bottom Layer w8: v2(2985,1255) v2(2985,1725)
VFB: C84.2 R68.2 R69.2 U4.2 | length 253.1
  Top Layer w8: U4.2@1413.15,387.82 1434.68,387.82 1450,372.5 R68.2@1544,372.5 ; R68.2@1544,370.5 R69.2@1544,411.44 1595.3,411.44 C84.2@1612,428.15
VIN: C53.2 C75.1 C76.1 C77.2 C78.2 C79.2 D5.1 P1.15 P9.3 P10.3 U4.1 U4.9 U4.10 | length 6051
  Top Layer w8: U4.1@1413.15,368.13 1413.15,338.41 C53.2@1436,315.56 1466.56,285 ; 1471.56,284 1501.57,284 ; 1496.57,285 1552,229.57 v1(1552,151)
  Top Layer w35: v5(1280,50) 1340.55,50 1379.05,88.5 1620.95,88.5 1664.45,45 2530,45 ; P1.15@2450,125 2530,45 ; v4(4355,50) 4350,45 2530,45
  Bottom Layer w8: v5(1280,50) 1318,88 1508.36,88 1535,114.64 1535,134 v1(1552,151)
  Bottom Layer w35: v3(765,195) 765,150 833.35,81.65 1248.35,81.65 v5(1280,50) ; P9.3@4295,1540 4258,1503 4258,1341.45 4258.5,1340.95 4258.5,1309.05 4258,1308.55 4258,642 P10.3@4295,605 4430,470 4430,125 v4(4355,50)
  other v3: 820,195 875,195 930,195 985,195
VREG5: C85.2 U4.3 | length 84.3
  Top Layer w8: U4.3@1413.15,407.5 1450.5,407.5 1456.44,413.44 C85.2@1495,413.44
VSSA: C17.1 C18.1 FB6.2 U1.135 | length 303.9
  Top Layer w8: U1.135@2704.13,1127.32 2737.32,1127.32 2774,1164 2873.44,1164 C17.1@2885,1152.44 2886.38,1151.06 2936.38,1151.06 FB6.2@2936.38,1100
XTAL1: C15.2 U1.12 X1.1 | length 430.1
  Top Layer w8: U1.12@2402.95,1389.13 2402.95,1432.95 2455,1485 2455,1542.56 C15.2@2552.44,1640 2552.44,1677.44 2570,1695 X1.1@2570,1750
XTAL2: C14.2 U1.13 X1.2 | length 393.5
  Top Layer w8: U1.13@2383.27,1389.13 2383.27,1433.27 2441,1491 2441,1636 C14.2@2445,1640 ; X1.2@2420.39,1750 2420.39,1689.61 2437.56,1672.44 C14.2@2437.56,1640
pads on no net: JTAG/DEBUG1.1@1353.5,1515.59 JTAG/DEBUG1.7 P1.1 U1.3 U1.11 U1.14 U1.32 U1.57 U1.58 U1.62 U1.63 U1.64 U1.66 U1.67 U1.68 U1.70 U1.73 U1.92 U1.93 U1.95 U1.99 U1.101 U1.103 U1.104 U1.105 U1.106 U1.108 U1.118 U1.120 U1.123 U1.124 U1.129 U1.130 U1.132 U1.133 U1.134 U1.140 U2.6 U2.9 U3.12 U3.13 U3.19 U3.20 U5.7 U7.1 U7.4 U7.5 U7.6 U7.8 U7.9 U7.10 U8.2 U8.6 U8.7 U9.1 USB0.GND USB1.4 USB1.GND

## Polygon pours and split planes (outlines as drawn)
NetD5_2 on Top Layer "Top Layer-No Net" (solid, remove dead copper, pour order 24): 475,325 475,200 700,200 700,325
SW on Top Layer "Mechanical 15-No Net" (solid, remove dead copper, pour order 14): 1320,422.5 1320,477.5 1045,477.5 1045,172.5 1095,172.5 1095,332.5 1195,332.5 1195,422.5
VBST on Top Layer "Mechanical 15-No Net" (solid, remove dead copper, pour order 15): 1320,412.5 1320,402.5 1245,402.5 1245,172.5 1150,172.5 1150,252.5 1205,252.5 1205,412.5
+6VCC on Top Layer "Mechanical 15-No Net" (solid, remove dead copper, pour order 21): 980,330 980,475 860,475 860,440 675,440 675,500 595,500 595,375 865,375 865,330
+6VCC on Top Layer "Mechanical 15-No Net" (solid, remove dead copper, pour order 23): 783,785 783,741 770,741 770,718 800,718 800,750 830,750 830,729 960,729 960,684 910,684 910,621 988,621 988,785
NetC96_1 on Top Layer "Mechanical 15-No Net" (solid, remove dead copper, pour order 25): 975,796 975,995 786,995 786,909 823,909 823,957 913,957 913,850 830,850 830,824 783,824 783,796
GND on Top Layer "Top Layer-No Net" (solid, remove dead copper, pour order 17): 1360,635 1430,635 1430,770 1390,810 1390,1034 1196,1034 1195,1035 1195,905 1325,905 1335,895 1335,810 1360,810
VIN on Top Layer "Mechanical 15-No Net" (solid, remove dead copper, pour order 18): 1300,105 1245,105 1245,125 1120,125 1120,70 875,70 875,160 740,160 740,355 855,355 855,235 1035,235 1035,165 1255,165 1255,393 1319,393 1319,362 1300,362
GND on Top Layer "Mechanical 15-No Net" (solid, remove dead copper, pour order 16): 1530,110 1325,110 1325,482.5 690,482.5 690,610 1405,610 1405,490 1425,490 1425,440 1395,440 1395,280 1460,280 1460,235 1530,235
GND on Bottom Layer "Top Layer-No Net" (solid, remove dead copper, pour order 22): 3366,2152 3366,1687 3519,1534 3519,1028 3500,1009 3499,1008 3475,1008 3386,1008 3372,994 3300,922 3300,830 3300,795 3365,730 3365,720 3365,-6 3470,-6 4630,-6 4631,-5 4631,83 4631,2152
-AVDD on Bottom Layer "Mechanical 15-No Net" (solid, remove dead copper, pour order 19): 3715,1155 3715,985 3885,985 3885,1115 4025,1115 4025,1155
GND on Bottom Layer "Mechanical 15-No Net" (solid, remove dead copper, pour order 26): 685,845 685,735 795,735 795,845
GND on Bottom Layer "Top Layer-No Net" (solid, remove dead copper, pour order 20): 567,25 567,1035 1635,1035 1635,1000 1636,25
GND on Mechanical 13 "Top Layer-No Net" (solid, remove dead copper, pour order 29): 0,0 0,2150 3355,2150 3355,2065 3355,1685 3355,1680 3380,1655 3510,1525 3510,1480 3510,1030 3500,1020 3405,1020 3385,1020 3375,1010 3290,925 3290,855 3290,790 3355,725 3355,0 1645,0 1645,45 1645,1045 1540,1045 555,1045 555,975 555,0
GND on Ground Plane (split plane): 4604.9,20.1 3370.1,20.1 3370.1,731 3369.71,732.95 3368.6,734.6 3305.1,798.11 3305.1,918.89 3388.11,1001.9 3499,1001.9 3500.95,1002.29 3502.6,1003.4 3523.6,1024.4 3524.71,1026.05 3525.1,1028 3525.1,1534 3524.71,1535.95 3523.6,1537.6 3375.1,1686.11 3375.1,1906 3374.71,1907.95 3373.6,1909.6 3371.95,1910.71 3370,1911.1 3368.05,1910.71 3366.4,1909.6 3365.29,1907.95 3364.9,1906 3364.9,1684 3365.29,1682.05 3366.4,1680.4 3514.9,1531.89 3514.9,1030.11 3496.89,1012.1 3386,1012.1 3384.05,1011.71 3382.4,1010.6 3296.4,924.6 3295.29,922.95 3294.9,921 3294.9,796 3295.29,794.05 3296.4,792.4 3359.9,728.89 3359.9,20.1 1641.1,20.1 1641.1,789 1641.1,1035 1640.71,1036.95 1639.6,1038.6 1637.95,1039.71 1636,1040.1 567,1040.1 565.05,1039.71 563.4,1038.6 562.29,1036.95 561.9,1035 561.9,470 562.29,468.05 563.4,466.4 565.05,465.29 567,464.9 568.95,465.29 570.6,466.4 571.71,468.05 572.1,470 572.1,1029.9 1630.9,1029.9 1630.9,789 1630.9,20.1 20.1,20.1 20.1,2129.9 4604.9,2129.9
AVDD on Power Plane (split plane): 4604.9,285.1 3360.1,285.1 3360.1,827.89 3412.11,879.9 3660,879.9 3661.95,880.29 3663.6,881.4 3678.6,896.4 3679.71,898.05 3680.1,900 3680.1,937.89 3713.6,971.4 3714.71,973.05 3715.1,975 3715.1,1160 3714.71,1161.95 3713.6,1163.6 3660.1,1217.11 3660.1,1485 3659.71,1486.95 3658.6,1488.6 3603.6,1543.6 3601.95,1544.71 3600,1545.1 3264.11,1545.1 3252.1,1557.11 3252.1,1665.89 3264.11,1677.9 3375,1677.9 3376.95,1678.29 3378.6,1679.4 3379.71,1681.05 3380.1,1683 3380.1,2129.9 4604.9,2129.9
no net on Power Plane (split plane): 1389.22,1466.67 1393.34,1465.68 1397.26,1464.06 1400.87,1461.84 1404.09,1459.09 1406.84,1455.87 1409.06,1452.26 1410.68,1448.34 1411.67,1444.22 1412,1440 1411.67,1435.78 1410.68,1431.66 1409.06,1427.74 1406.84,1424.13 1404.09,1420.91 1400.87,1418.16 1397.26,1415.94 1393.34,1414.32 1389.22,1413.33 1385,1413 1380.78,1413.33 1376.66,1414.32 1372.74,1415.94 1369.13,1418.16 1365.91,1420.91 1363.16,1424.13 1360.94,1427.74 1359.32,1431.66 1358.33,1435.78 1358,1440 1358.33,1444.22 1359.32,1448.34 1360.94,1452.26 1363.16,1455.87 1365.91,1459.09 1369.13,1461.84 1372.74,1464.06 1376.66,1465.68 1380.78,1466.67 1385,1467
+6VCC on Power Plane (split plane): 1264.9,475 1265.29,473.05 1266.4,471.4 1656.4,81.4 1658.05,80.29 1660,79.9 3355,79.9 3356.95,80.29 3358.6,81.4 3359.71,83.05 3360.1,85 3360.1,274.9 4604.9,274.9 4604.9,20.1 1160.1,20.1 1160.1,110 1159.71,111.95 1158.6,113.6 1013.6,258.6 1011.95,259.71 1010,260.1 590.1,260.1 590.1,554.9 1264.9,554.9
DVDD on Power Plane (split plane): 3369.9,1688.1 3262,1688.1 3260.05,1687.71 3258.4,1686.6 3243.4,1671.6 3242.29,1669.95 3241.9,1668 3241.9,1555 3242.29,1553.05 3243.4,1551.4 3258.4,1536.4 3260.05,1535.29 3262,1534.9 3597.89,1534.9 3649.9,1482.89 3649.9,1215 3650.29,1213.05 3651.4,1211.4 3704.9,1157.89 3704.9,977.11 3671.4,943.6 3670.29,941.95 3669.9,940 3669.9,902.11 3657.89,890.1 3410,890.1 3408.05,889.71 3406.4,888.6 3351.4,833.6 3350.29,831.95 3349.9,830 3349.9,280 3349.9,90.1 1662.11,90.1 1275.1,477.11 1275.1,1027.89 1274.71,1029.84 1273.6,1031.49 1271.95,1032.6 1270,1032.99 775.1,1032.99 775.1,1098.8 823.6,1147.31 824.71,1148.97 825.1,1150.92 825.1,1189.99 825.1,1289.89 925,1289.89 926.95,1290.28 928.6,1291.38 929.71,1293.04 930.1,1294.99 930.1,1355 929.71,1356.95 928.6,1358.6 926.95,1359.71 925,1360.1 670,1360.1 668.05,1359.71 666.4,1358.6 562.89,1255.1 20.1,1255.1 20.1,2129.9 3369.9,2129.9
5VDC on Power Plane (split plane): 919.9,1300.09 820,1300.09 818.05,1299.7 816.4,1298.59 815.29,1296.94 814.9,1294.99 814.9,1189.99 814.9,1153.03 766.4,1104.52 765.29,1102.87 764.9,1100.92 764.9,1027.89 765.29,1025.94 766.4,1024.28 768.05,1023.18 770,1022.79 1264.9,1022.79 1264.9,565.1 20.1,565.1 20.1,1244.9 565,1244.9 566.95,1245.29 568.6,1246.4 672.11,1349.9 919.9,1349.9
VIN on Power Plane (split plane): 579.9,255 580.29,253.05 581.4,251.4 583.05,250.29 585,249.9 1007.89,249.9 1149.9,107.89 1149.9,20.1 20.1,20.1 20.1,554.9 579.9,554.9

## Keep-outs
Keep-Out Layer:
  lines w10: 15,15 4610,15 4610,2135 15,2135 15,15

## Other copper
Ground Plane (plane layer: these items are gaps in the copper):
  lines w10: 567,470 567,1035 1636,1035 1636,789 1636,0 ; 3365,-3 3365,731 3300,796 3300,921 3386,1007 3499,1007 3520,1028 3520,1534 3370,1684 3370,1906
Power Plane (plane layer: these items are gaps in the copper):
  circle w10: c1385,1440 r32.02
  lines w10: -5,560 315,560 585,560 ; -5,1250 565,1250 670,1355 735,1355 832.21,1355 925,1355 925,1294.99 820,1294.99 820,1189.99 820,1150.92 770,1100.92 770,1027.89 1270,1027.89 1270,475 1660,85 3355,85 ; 1155,0 1155,110 1010,255 585,255 585,560 ; 1200,0 1195,5 1550,5 ; 1270,560 585,560 ; 3375,2147 3375,1683 3262,1683 3247,1668 3247,1555 3262,1540 3600,1540 3655,1485 3655,1215 3710,1160 3710,975 3675,940 3675,900 3660,885 3410,885 3355,830 3355,85 ; 4625,280 3550,280 3355,280 3355,85

## Silkscreen, mask and mechanical layers (free items; w line width, h text height)
Top Overlay:
  circle w10: c1250,2025 r76.32
  circle w10: c3250,325 r76.32
  circle w10: c3250,1425 r76.32
  text "H" at 2640,1625 h350
  text "VIN" at 4205,1595 h90
  text "5VDC" at 4360,1595 h90
  text "Hammerhead" at 2635,1550 h100
  text "USB Analog Power" at 3155,1520 h60
  text "SSP1" at 3175,1285 h75
  text "G" at 3680,510 h260
  text "VIN" at 4205,495 h90
  text "5VDC" at 4360,495 h90
Bottom Overlay:
  text "Designed By Adam Vadala-Roth" at 4190,760 h100
  text "Powered By The Bowler Communications System" at 4190,675 h100
  text "Developed by Neuron Robotics" at 4190,590 h100
  text "Special Thanks to Kevin Harrington" at 4190,505 h100
  text "and Alex Camilo" at 4190,420 h100
Mechanical 13:
  lines w10: 4395,15 4395,605
Mechanical 15:
  lines w5: 0,0 0,2150 4425,2150 4625,2150 4625,0 4485,0 0,0